# Altium PCB EncoderArm_PhotoReflector.PcbDoc
Units mil, origin at the board's own origin, x right, y up, seen from the top; angles counter-clockwise.
Board outline 1290 x 2525 mil, 2 copper layers (Top Layer, Bottom Layer); 9 components, 8 nets, 33 pads, 7 vias.
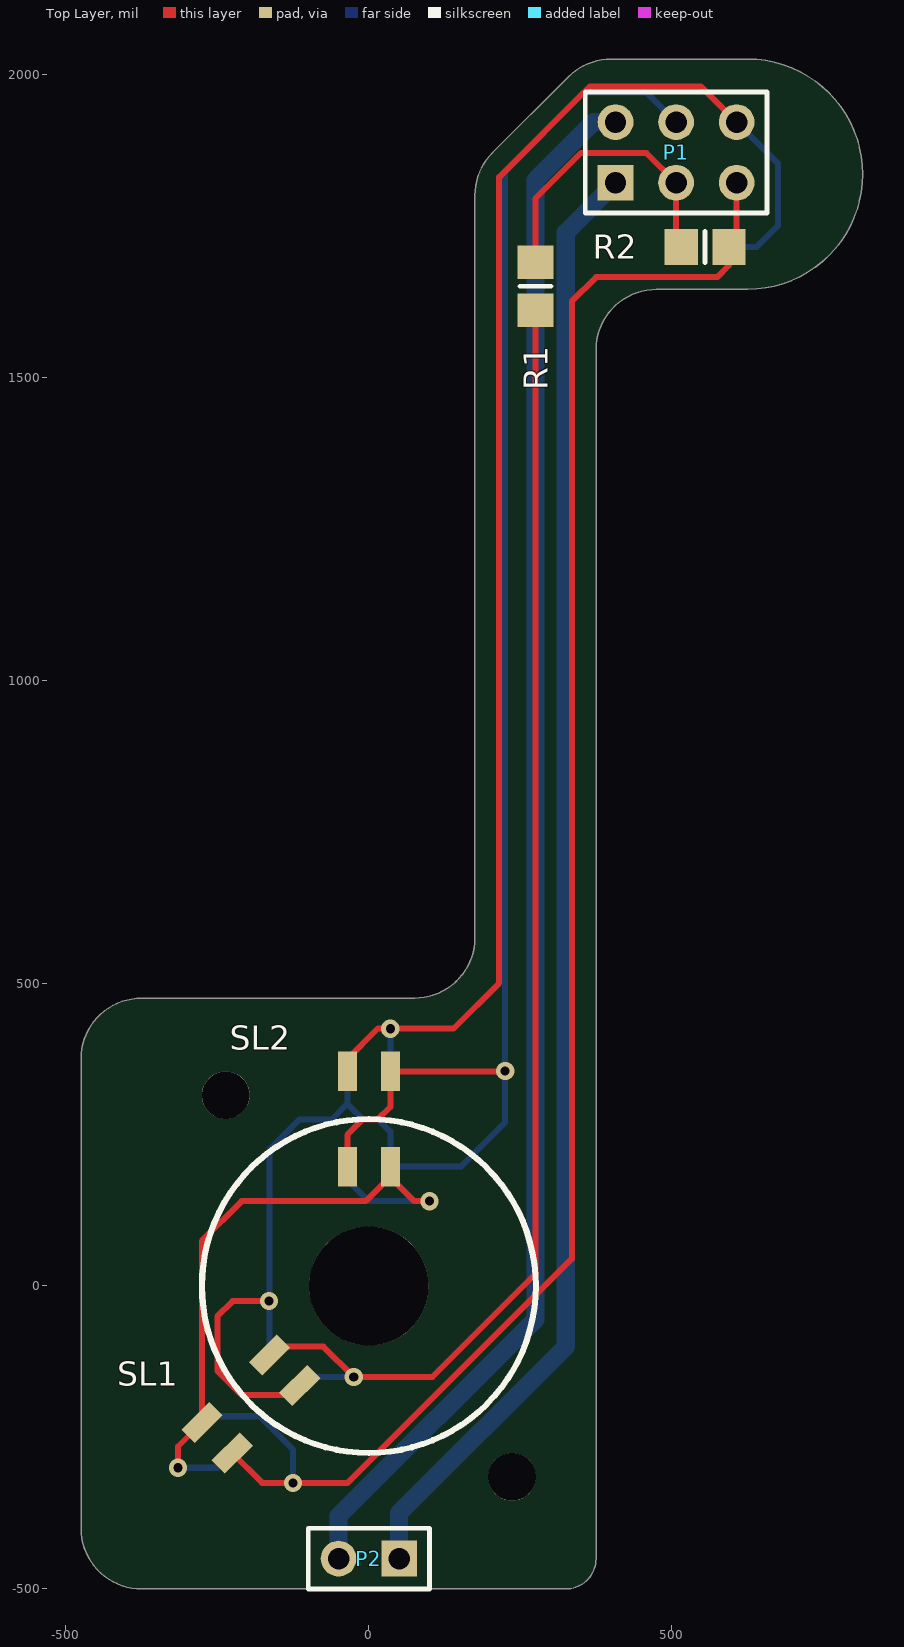
[diagram p0: Top Layer view]
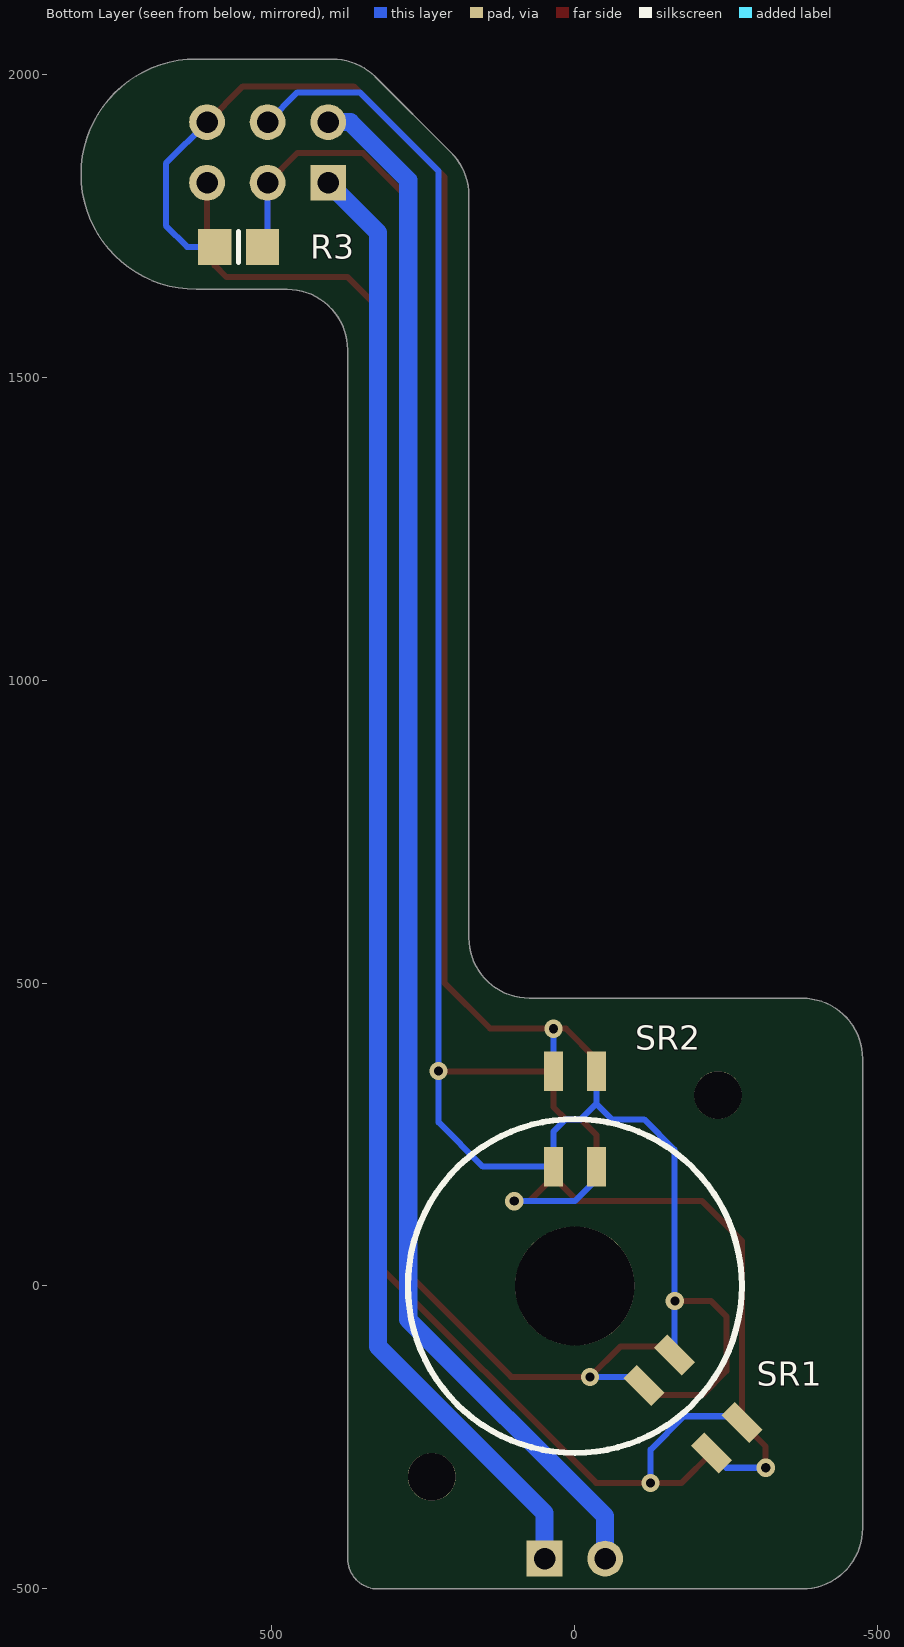
[diagram p1: Bottom Layer view, seen from below]

## Layer stack, top to bottom
Top Solder: solder mask 0.4, Solder Resist, Dk 3.5
Top Layer: signal copper 1.4
Dielectric 1: dielectric 12.6, FR-4, Dk 4.8
Bottom Layer: signal copper 1.4
Bottom Solder: solder mask 0.4, Solder Resist, Dk 3.5

## Board outline
-475,-400 ccw(c-375,-400) -375,-500 325,-500 ccw(c325,-450) 375,-450 375,1545 cw(c475,1545) 475,1645 625,1645 ccw(c625,1835) 625,2025 400,2025 ccw(c400,1925) 329.29,1995.71 204.29,1870.71 ccw(c275,1800) 175,1800 175,575 cw(c75,575) 75,475 -375,475 ccw(c-375,375) -475,375

## Design rules (kind name [scope] priority, off if disabled: settings)
Clearance [All] p1: gap=10
PolygonConnect [All] p1: connectstyle=Relief reliefconductorwidth=10 reliefentries=4 polygonreliefangle="90 Angle" airgapwidth=10
RoutingVias [All] p1: holewidth=28 width=50 viastyle="Through Hole" minholewidth=28 minwidth=50 maxholewidth=28 maxwidth=50
SolderMaskExpansion [All] p1: expansion=4
Width [All] p1: maxlimit=30 minlimit=10 preferedwidth=10
30 further rules are at their usual default settings.

## Classes and differential pairs
net class Power: M1A M1B

## Components (designator, comment, footprint, x,y, rotation, side; value= is the part's Value field where it differs from the comment)
P1 "Header 3X2" HDR2X3 407.09,1820.87 r0 top locked
P2 "Motor" HDR1X2 50,-450 r180 top
R1 "Res2" 6-0805_M 275,1650 r90 top
R2 "Res2" 6-0805_M 555,1715 r180 top
R3 "Res2" 6-0805_M 555,1715 r180 bottom
SL1 "QRE1113" QRE1113GR -194.87,-194.87 r225 top locked
SL2 "QRE1113" QRE1113GR 0,275.59 r90 top
SR1 "QRE1113" QRE1113GR -194.87,-194.87 r225 bottom locked
SR2 "QRE1113" QRE1113GR 0,275.59 r90 bottom

## Footprints (in the part's own frame and the unit in brackets; to place one, negate y for a bottom-side part, rotate by r counter-clockwise, add the part's x,y. Pads: shape width x height; smd on the part's side, far side on the other; paste and mask are expansions set on the pad)
6-0805_M [mm] "Chip Resistor, Body 2.0x1.2mm, IPC Low Density"
  rect 1.4x1.5 smd: 1(-1,0) 2(1,0)
  silkscreen extent 0,-0.65 0,0.65, body extent -1.07,-0.7 1.07,0.7, height 0.7
HDR1X2 [mm] "Connector; Header; 2 Position"
  rect 1.5x1.5 hole 0.9: 1(0,0)
  round 1.5 hole 0.9: 2(2.54,0)
  silkscreen extent -1.27,-1.27 3.81,1.27
HDR2X3 [mm] "Connector; Header; 3x2 Position"
  rect 1.5x1.5 hole 0.9: 1(0,0)
  round 1.5 hole 0.9: 2(0,2.54) 3(2.54,0) 4(2.54,2.54) 5(5.08,0) 6(5.08,2.54)
  silkscreen extent -1.27,-1.27 6.35,3.81
QRE1113GR [mm] "Digikey QRE1113GRCT-ND"
  rect 1.66x0.79 smd: 1(-2,-0.9) 2(2,-0.9) 3(2,0.9) 4(-2,0.9)

## Part data
P1: "Header, 3-Pin, Dual row"
P2: library part "Header 2", "Header, 2-Pin"
R1 R2 R3: "Resistor"

## Free pads (board coordinates)
  round 78.74 hole 78.74: 0(-236.22,314.96) 0(236.22,-314.96)
  round 196.85 hole 196.85: 0(0,0)

## Via types
v1: diameter 30, hole 15, Top Layer to Bottom Layer, 7 vias

## Nets (pads, with @x,y where several pads share a name; then routed paths per layer and width w, separated by ;. In a path a pad name is that pad's centre, name@x,y a point inside that pad or via, vN(x,y) a via of type N, cw(c..) or ccw(c..) an arc to the next point about the centre after c; other vN are vias at no path point)
3V3: P1.3 R1.2 R2.2 R3.2 | length 607.9
  Top Layer w10: R1.2 275,1795 350,1870 457.95,1870 P1.3 507.09,1723.54 R2.2
  Bottom Layer w10: P1.3 507.09,1723.54 R3.2
GND: P1.4 SL1.4 SL2.2 SL2.4 SR1.4 SR2.2 SR2.4 | length 3601.5
  Top Layer w10: v1(-165,-25) -225,-25 -250,-50 -250,-140 -210,-180 -129.89,-180 SL1.4 SL1.4@-100,-150.11 ; SL2.4 -35.43,249.57 -10,275 15,275 35.43,295.43 SL2.2 v1@224.33,354.33
  Bottom Layer w10: SR1.4 -164.25,225 -114.25,275 -60.87,275 -35.43,300.43 ; SR2.2 -35.43,300.43 ; P1.4 457.95,1970 355,1970 225,1840 225,270 151.85,196.85 SR2.4 35.43,254.57 15,275 -10,275 -35.43,300.43
  other v1: 225,355
M1A: P1.1 P2.1 | length 2418.8
  Bottom Layer w30: P2.1 50,-375 325,-100 325,1738.78 P1.1
M1B: P1.2 P2.2 | length 2581.4
  Bottom Layer w30: P2.2 -50,-380 275,-55 275,1825 370.87,1920.87 P1.2
NetR1_1: R1.1 SL1.1 SR1.1 | length 2252.5
  Top Layer w10: SL1.1@-175.11,-125 SL1.1 -150.11,-100 -75,-100 v1(-25,-150) 105,-150 275,20 R1.1
  Bottom Layer w10: SR1.1@-124.89,-175 SR1.1 -114.14,-164.14 -100,-150 v1(-25,-150)
NetSL1_2: SL1.2 SL2.1 SR1.2 SR2.1 | length 1115.1
  Top Layer w10: v1(-315,-300) -315,-264.89 SL1.2 -275.6,74.4 -210,140 -5,140 SL2.1@35.43,180.43 ; SL2.1 SL2.1@35.43,180.43 ; v1(100,140) 75,140 35.43,179.57 SL2.1@35.43,180.43
  Bottom Layer w10: v1(-315,-300) -249.89,-300 SR1.2 ; SR2.1 -35.43,175.43 0,140 v1(100,140)
VOUT1: P1.5 R2.1 SL1.3 SR1.3 | length 2972.7
  Top Layer w10: SL1.3 -176.1,-325 v1(-125,-325) -35,-325 335,45 335,1625 375,1665 575,1665 594.37,1684.37 R2.1 607.09,1727.72 P1.5
  Bottom Layer w10: SR1.3 -265.11,-215 -180,-215 -125,-270 v1(-125,-325)
VOUT2: P1.6 R3.1 SL2.3 SR2.3 | length 2495.7
  Top Layer w10: SL2.3 -35.43,374.57 15,425 140,425 215,500 215,1830 365,1980 547.95,1980 P1.6
  Bottom Layer w10: SR2.3 v1(35.43,424.57) ; R3.1 640,1715 675,1750 675,1852.95 P1.6

## Silkscreen, mask and mechanical layers (free items; w line width, h text height)
Top Overlay:
  circle w10: c0,0 r275.59
Bottom Overlay:
  circle w10: c0,0 r275.59
Mechanical 1:
  lines w10: -475,-400 ccw(c-375,-400) -375,-500 325,-500 ccw(c325,-450) 375,-450 375,1545 cw(c475,1545) 475,1645 625,1645 ccw(c625,1835) 625,2025 400,2025 ccw(c400,1925) 329.29,1995.71 204.29,1870.71 ccw(c275,1800) 175,1800 175,575 cw(c75,575) 75,475 -375,475 ccw(c-375,375) -475,375 -475,-400